# Altium PCB Shared_IoT_Dev.PcbDoc
Units mil, origin at the board's own origin, x right, y up, seen from the top; angles counter-clockwise.
Board outline 2625 x 2375 mil, 2 copper layers (Top Layer, Bottom Layer); 59 components, 68 nets, 257 pads, 156 vias.
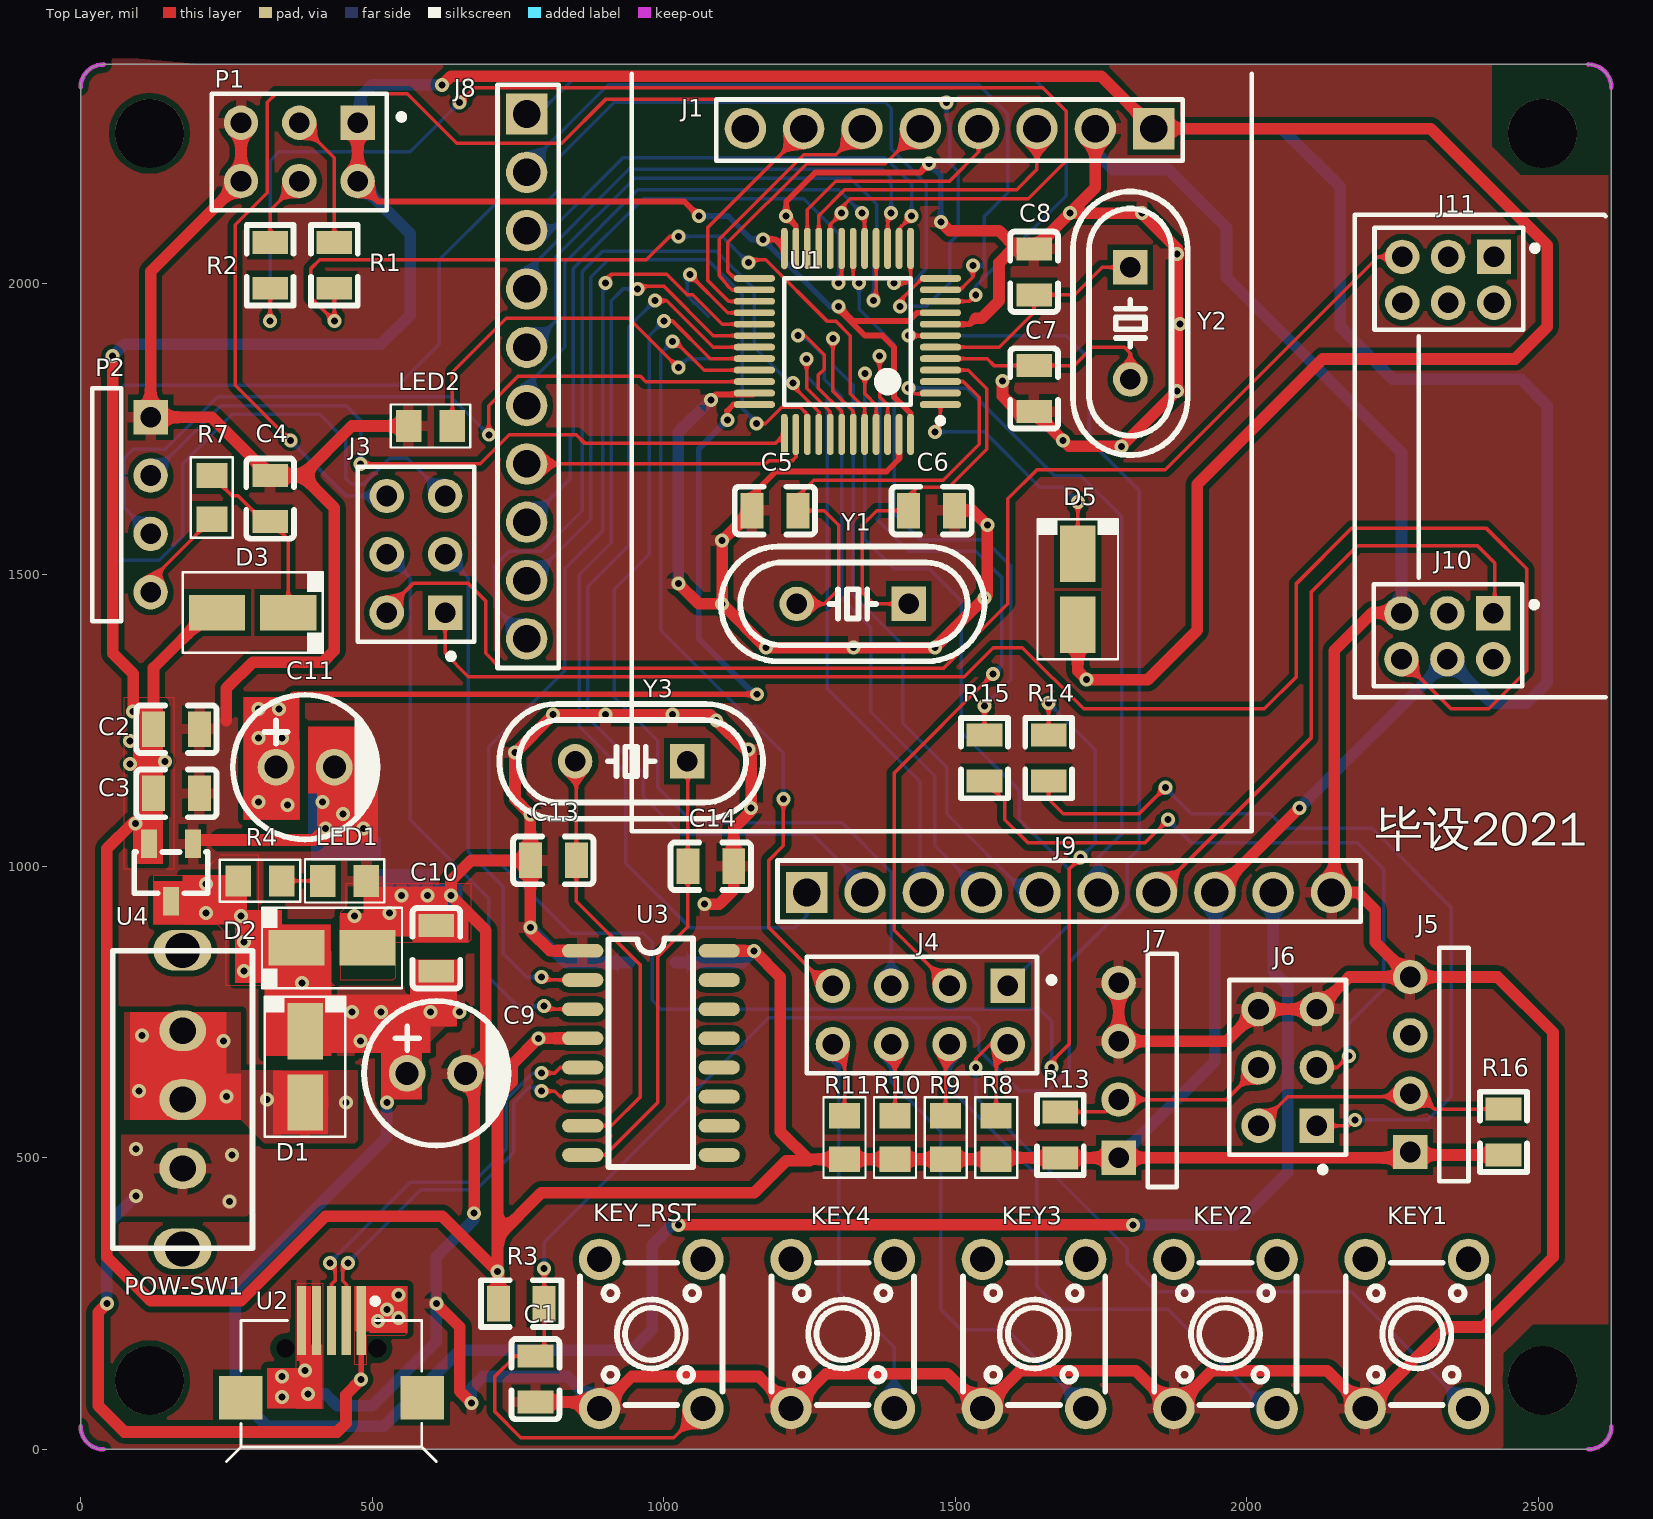
[diagram p0: Top Layer view]
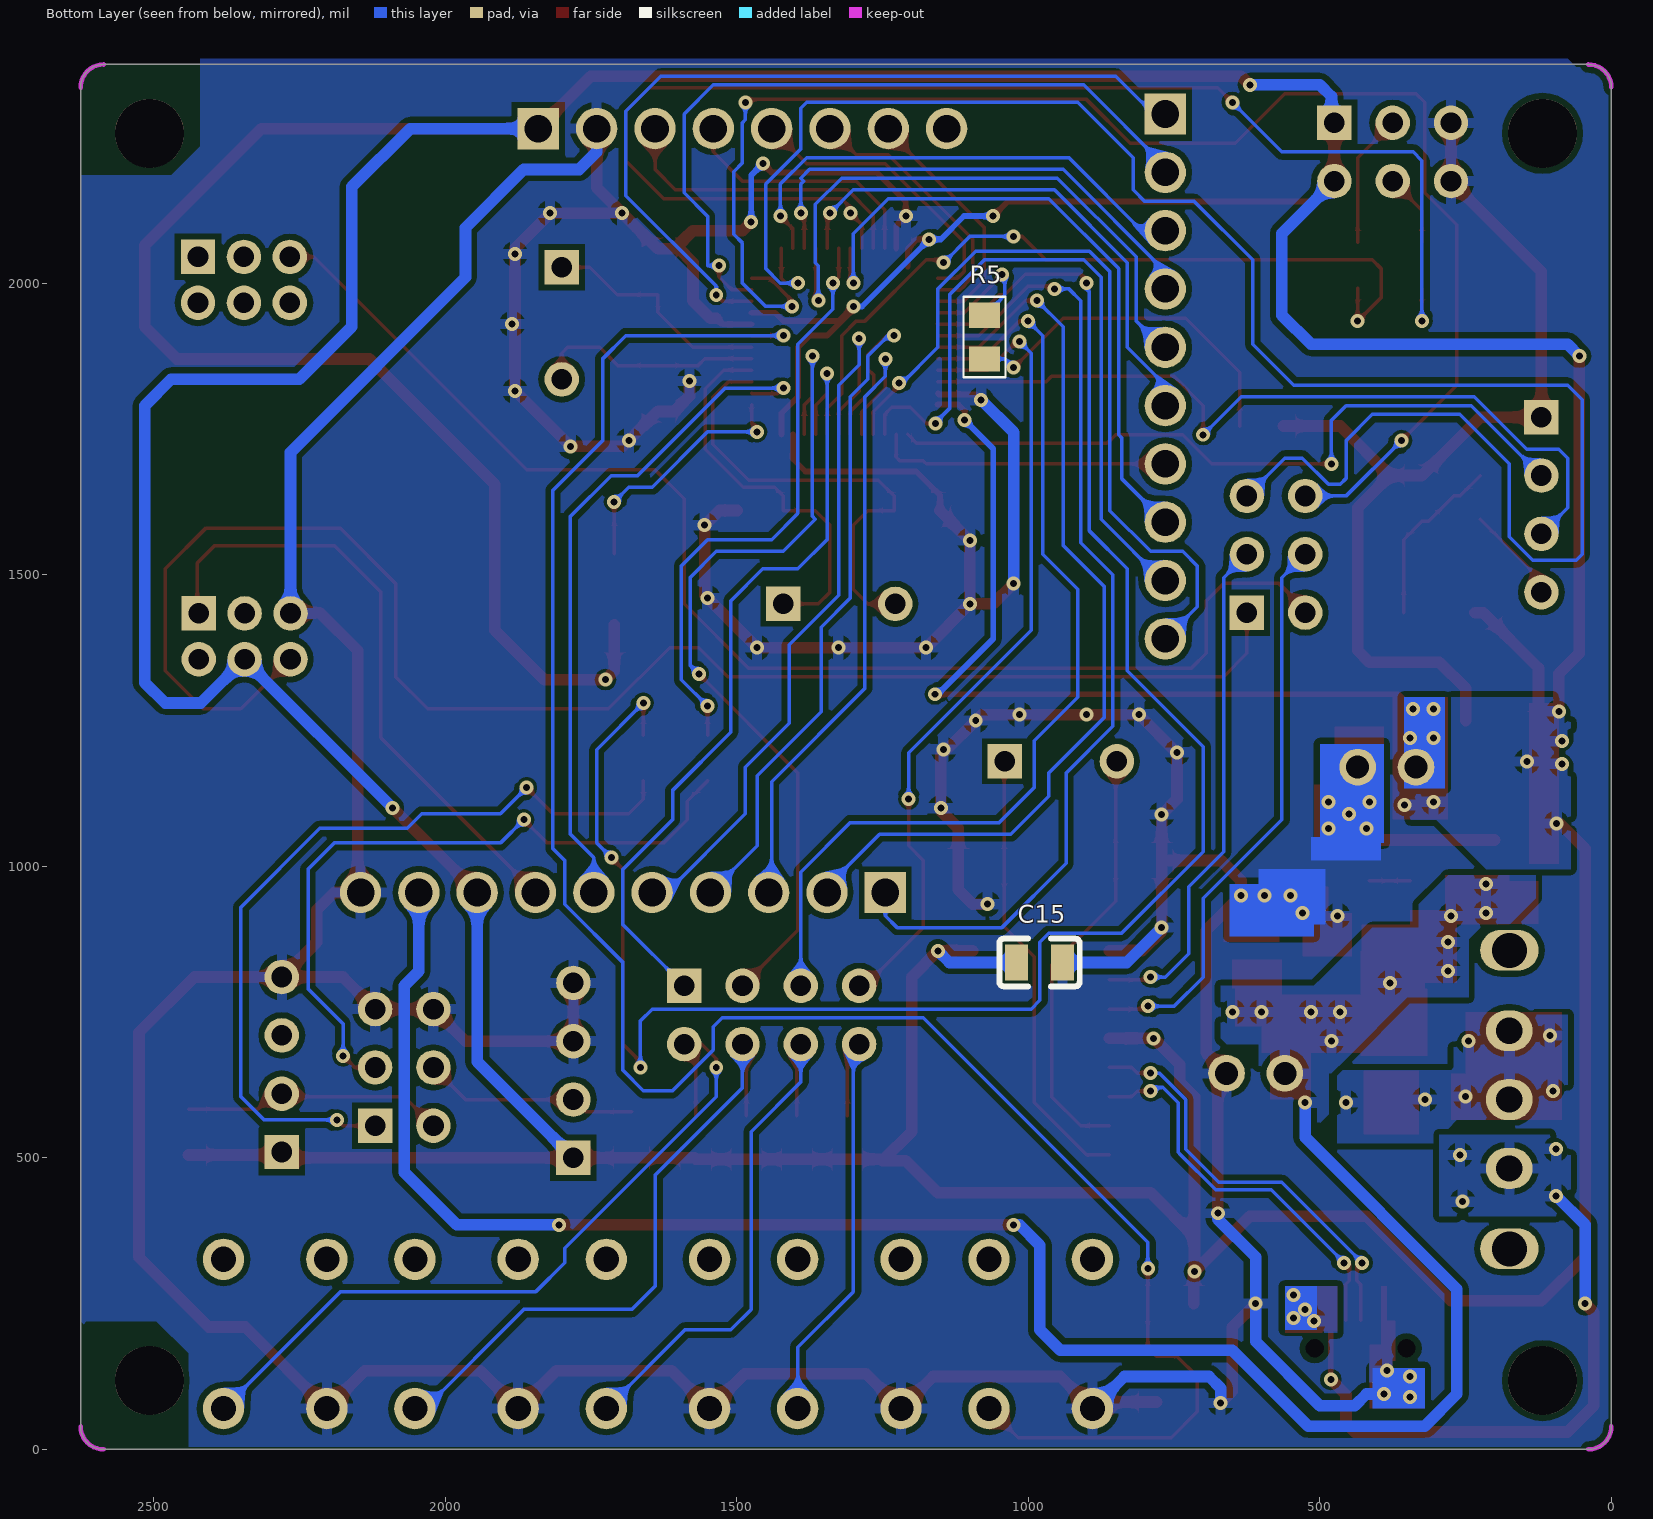
[diagram p1: Bottom Layer view, seen from below]

## Layer stack, top to bottom
Top Solder: solder mask 0.4, Solder Resist, Dk 3.5
Top Layer: signal copper 1.4
Dielectric 1: dielectric 12.6, FR-4, Dk 4.8
Bottom Layer: signal copper 1.4
Bottom Solder: solder mask 0.4, Solder Resist, Dk 3.5

## Board outline
39.37,0 cw(c39.37,39.37) 0,39.99 0,39.37 0,2335.63 cw(c39.37,2335.63) 39.99,2375 39.37,2375 2585.63,2375 cw(c2585.63,2335.63) 2625,2335.01 2625,2335.63 2625,39.37 cw(c2585.63,39.37) 2585.01,0 2585.63,0

## Design rules (kind name [scope] priority, off if disabled: settings)
Clearance via_poly [IsVia vs InPolygon] p1: gap=6
Clearance poly [InPolygon] p2: gap=10
Clearance all [All] p3: gap=6
DiffPairsRouting [InDifferentialPairClass('90OM')] p1: maxlimit=7 minlimit=7 mostfreqgap=7 toplayer_minwidth=6 toplayer_maxwidth=6 toplayer_prefwidth=6 bottomlayer_minwidth=6 bottomlayer_maxwidth=6 bottomlayer_prefwidth=6 maxuncoupledlength=500
HoleToHoleClearance [All] p1: gap=0 allowstackedmicrovias=TRUE
MinimumSolderMaskSliver [All] p1: minsoldermaskwidth=0
PolygonConnect [All] p1: connectstyle=Relief reliefconductorwidth=18 reliefentries=4 polygonreliefangle="90 Angle" airgapwidth=10
RoutingVias [All] p1: holewidth=12 width=24 viastyle="Through Hole" minholewidth=12 minwidth=24 maxholewidth=12 maxwidth=24
SilkToSilkClearance [All] p1: silktosilkclearance=2
SilkToSolderMaskClearance [IsPad] p1: minsilkscreentomaskgap=2 clearancetoexposedcopper=TRUE
SolderMaskExpansion [All] p1: expansion=2.5
Width gnd [InNetClass('GND')] p1: maxlimit=30 minlimit=10 preferedwidth=20
Width pwr [InNetClass('PWR')] p2: maxlimit=30 minlimit=10 preferedwidth=20
Width wall [All] p3: maxlimit=6 minlimit=6 preferedwidth=6
25 further rules are at their usual default settings.

## Classes and differential pairs
net class GND: GND
net class PWR: VBUS VCC3V3 VCC5V
differential pair class 90OM: USB1
differential pair USB1: +D+ -D-

## Components (designator, comment, footprint, x,y, rotation, side; value= is the part's Value field where it differs from the comment)
C1 "CAP" C0805 780,160 r270 top
C2 "CAP" C0805 125,1235 r0 top
C3 "CAP" C0805 125,1125 r0 top
C4 "CAP" C0805 325,1591.26 r90 top
C5 "CAP" C0805 1151.26,1610 r0 top
C6 "CAP" C0805 1498.74,1610 r180 top
C7 "CAP" C0805 1635,1858.74 r270 top
C8 "CAP" C0805 1635,1980 r90 top
C9 "CAP_POL" CAP-TH_POL 560,645 r0 top
C10 "CAP" C0805 610,898.74 r270 top
C11 "CAP_POL" CAP-TH_POL 335,1170 r0 top
C13 "22pF" C0805 850,1010 r180 top
C14 "22pF" C0805 1041.26,1000 r0 top
C15 "0.1uF" C0805 1020,835 r180 bottom
D1 "1N4007" SMA 385,656.02 r270 top
D2 "1N4007" SMA 431.02,860 r0 top
D3 "1N4007" SMA 295,1435 r180 top
D5 "Diode 1N4148" SMA 1710,1475 r270 top
J1 "Header_8" HDR-TH_8P-P2.54-V 1840,2265 r180 top
J3 "Header 3X2" HDR2X3 625,1435 r90 top
J4 "Header4x2" HDR2X4 1590,795 r180 top
J5 "DHT11" HDR1X4H 2280,510 r90 top
J6 "Header 3X2" HDR2X3 2120,555 r90 top
J7 "DS18B20" HDR1X4H 1780,500 r90 top
J8 "Header_10" HDR-TH_10P-P2.54-V 765,2290 r270 top
J9 "Header_10" HDR-TH_10P-P2.54-V 1245,955 r0 top
J10 "Header3X2_Small" HDR3X2_Small 2422.48,1433.74 r180 top
J11 "Header3X2_Small" HDR3X2_Small 2423.74,2045 r180 top
KEY1 "KEY" KEY-TH_4P 2202.8,70 r90 top
KEY2 "KEY" KEY-TH_4P 1874.6,70 r90 top
KEY3 "KEY" KEY-TH_4P 1546.4,70 r90 top
KEY4 "KEY" KEY-TH_4P 1218.2,70 r90 top
KEY_RST "KEY" KEY-TH_4P 890,70 r90 top
LED1 "LED2_1" 0805C 452.6,975 r0 top
LED2 "LED2_1" 0805C 600,1755 r180 top
P1 "Header 3X2" HDR2X3 475,2275 r180 top
P2 "SWD" HDR1X4H 120,1770 r270 top
POW-SW1 "Switch" SW 175,600 r90 top
R1 "100K,0603" R0805 435,1991.26 r90 top
R2 "100K,0603" R0805 325,2070 r270 top
R3 "10K,0603" R0805 795,250 r180 top
R4 "Res2" 0805R 307.6,975 r0 top
R5 "Res2" 0805R 1075,1907.4 r270 bottom
R7 "Res2" 0805R 225,1632.6 r90 top
R8 "Res2" 0805R 1570,535 r270 top
R9 "Res2" 0805R 1483.33,535 r270 top
R10 "Res2" 0805R 1396.67,535 r270 top
R11 "Res2" 0805R 1310,535 r270 top
R13 "4.7K" R0805 1680,578.74 r270 top
R14 "100" R0805 1660,1146.26 r90 top
R15 "100" R0805 1550,1146.26 r90 top
R16 "4.7K" R0805 2440,583.74 r270 top
U1 "STM32F103C8T6" 48P 1315,1900 r180 top
U2 "USB-mrico" MICRO_USB 430,155 r0 top
U3 "CH340G" CH340G_SOIC 861,855 r180 top
U4 "XC6206P332MR" XC_SOT-23-3 192.4,1038.4 r90 top
Y1 "32.768K" CRYSTAL 1420,1450 r180 top
Y2 "8M" CRYSTAL 1800,2027 r270 top
Y3 "CRYSTAL_12M" CRYSTAL 1040,1180 r180 top

## Footprints (in the part's own frame and the unit in brackets; to place one, negate y for a bottom-side part, rotate by r counter-clockwise, add the part's x,y. Pads: shape width x height; smd on the part's side, far side on the other; paste and mask are expansions set on the pad)
48P [mm]
  oval 1.8x0.3 smd: 1(-4.05,2.75) 2(-4.05,2.25) 3(-4.05,1.75) 4(-4.05,1.25) 5(-4.05,0.75) 6(-4.05,0.25) 7(-4.05,-0.25) 8(-4.05,-0.75) 9(-4.05,-1.25) 10(-4.05,-1.75) 11(-4.05,-2.25) 12(-4.05,-2.75) 25(4.05,-2.75) 26(4.05,-2.25) 27(4.05,-1.75) 28(4.05,-1.25) 29(4.05,-0.75) 30(4.05,-0.25) 31(4.05,0.25) 32(4.05,0.75) 33(4.05,1.25) 34(4.05,1.75) 35(4.05,2.25) 36(4.05,2.75)
  oval 0.3x1.8 smd: 13(-2.75,-4.05) 14(-2.25,-4.05) 15(-1.75,-4.05) 16(-1.25,-4.05) 17(-0.75,-4.05) 18(-0.25,-4.05) 19(0.25,-4.05) 20(0.75,-4.05) 21(1.25,-4.05) 22(1.75,-4.05) 23(2.25,-4.05) 24(2.75,-4.05) 37(2.75,4.05) 38(2.25,4.05) 39(1.75,4.05) 40(1.25,4.05) 41(0.75,4.05) 42(0.25,4.05) 43(-0.25,4.05) 44(-0.75,4.05) 45(-1.25,4.05) 46(-1.75,4.05) 47(-2.25,4.05) 48(-2.75,4.05)
  silkscreen extent -4.18,-2.75 2.75,3.57, body extent -3.5,-3.5 3.5,3.5, height 1.6
0805C [mm] "Chip Capacitor, 2-Leads, Body 2.0x1.3mm, IPC Medium Density"
  rect 1.1x1.4 smd: 1(-0.95,0) 2(0.95,0)
  silkscreen extent -1.73,-0.94 1.73,0.94, body extent -1.05,-0.67 1.05,0.67, height 1.2
0805R [mm] "Chip Resistor, 2-Leads, Body 2.0x1.3mm, IPC Medium Density"
  rect 1.1x1.35 smd: 1(-0.95,0) 2(0.95,0)
  silkscreen extent -1.75,-0.91 1.75,0.91, body extent -1.05,-0.67 1.05,0.67, height 1.2
C0805 [mm]
  rect 1x1.55 smd: 1(0,0) 2(2,0)
  silkscreen extent -0.75,-1.04 2.75,1.04
CAP-TH_POL [mm]
  round 1.6 hole 1: 1(0,0) 2(2.54,0)
  silkscreen extent -1.88,-3.15 4.44,3.15
CH340G_SOIC [mm]
  oval 1.798x0.6 smd: 1(0,0) 2(0,1.27) 3(0,2.54) 4(0,3.81) 5(0,5.08) 6(0,6.35) 7(0,7.62) 8(0,8.89) 9(-5.944,8.89) 10(-5.944,7.62) 11(-5.944,6.35) 12(-5.944,5.08) 13(-5.944,3.81) 14(-5.944,2.54) 15(-5.944,1.27) 16(-5.944,0)
  silkscreen extent -4.8,-0.53 -1.12,9.42
CRYSTAL [mm]
  rect 1.5x1.5 hole 0.9: 1(0,0)
  round 1.5 hole 0.9: 2(4.877,0)
  silkscreen extent -3.3,-2.5 8.18,2.5
HDR1X4H [mm] "Connector; Header; 4 Position; Right Angle"
  rect 1.5x1.5 hole 0.9: 1(0,0)
  round 1.5 hole 0.9: 2(2.54,0) 3(5.08,0) 4(7.62,0)
  silkscreen extent -1.27,-2.54 8.89,-1.27
HDR2X3 [mm] "Connector; Header; 3x2 Position"
  rect 1.5x1.5 hole 0.9: 1(0,0)
  round 1.5 hole 0.9: 2(0,2.54) 3(2.54,0) 4(2.54,2.54) 5(5.08,0) 6(5.08,2.54)
  silkscreen extent -2.03,-1.27 6.35,3.81
HDR2X4 [mm]
  rect 1.5x1.5 hole 0.9: 1(0,0)
  round 1.5 hole 0.9: 2(0,2.54) 3(2.54,0) 4(2.54,2.54) 5(5.08,0) 6(5.08,2.54) 7(7.62,0) 8(7.62,2.54)
  silkscreen extent -2.03,-1.27 8.76,3.81
HDR3X2_Small [mm]
  rect 1.5x1.5 hole 0.9: 1(0,0)
  round 1.5 hole 0.9: 2(0,2) 3(2,0) 4(2,2) 5(4,0) 6(4,2)
  silkscreen extent -1.91,-1.27 5.21,3.18
HDR-TH_8P-P2.54-V [mm]
  rect 1.8x1.8 hole 1.2: 1(0,0)
  round 1.8 hole 1.2: 2(2.54,0) 3(5.08,0) 4(7.62,0) 5(10.16,0) 6(12.7,0) 7(15.24,0) 8(17.78,0)
  silkscreen extent -1.27,-1.27 19.05,1.4
HDR-TH_10P-P2.54-V [mm]
  rect 1.8x1.8 hole 1.2: 1(0,0)
  round 1.8 hole 1.2: 2(2.54,0) 3(5.08,0) 4(7.62,0) 5(10.16,0) 6(12.7,0) 7(15.24,0) 8(17.78,0) 9(20.32,0) 10(22.86,0)
  silkscreen extent -1.27,-1.27 24.13,1.4
KEY-TH_4P [mm]
  round 1.8 hole 1.1: 1(0,0) 2(6.502,0) 3(0,-4.501) 4(6.502,-4.501)
  silkscreen extent 0.15,-5.35 6.35,0.85
MICRO_USB [mm]
  rect 0.4x3 smd: 1(1.3,1.679) 2(0.65,1.679) 3(0,1.679) 4(-0.65,1.679) 5(-1.3,1.679)
  round 0 hole 0.8 unplated: MH1(2,0.471) MH2(-2,0.471)
  rect 1.9x1.9 smd: ""(-3.95,-1.679) ""(3.95,-1.679)
  silkscreen extent -4.57,-4.46 4.57,2.64
R0805 [mm]
  rect 1x1.55 smd: 1(0,0) 2(2,0)
  silkscreen extent -0.75,-1.02 2.75,1.02
SMA [mm] "Molded Diode, 2-Leads, Body 4.3x2.7mm, IPC Medium Density"
  rect 2.45x1.55 smd: 1(1.55,0) 2(-1.55,0)
  silkscreen extent -3.05,-1.75 3.05,1.75, body extent -2.3,-1.45 2.3,1.45, height 2.44
SW [mil]
  oval 70x80 hole 45: 1(-118.11,0) 2(0,0) 3(118.11,0)
  oval 70x100 hole 60: 4(-255.91,0) 5(255.91,0)
  silkscreen extent -255,-120 255,120
XC_SOT-23-3 [mm]
  rect 1.25x0.7 smd: 1(0,0) 2(0,1.9) 3(-2.499,0.95)
  silkscreen extent -2.15,-0.65 -0.35,2.55

## Part data
C13 C14 C15: library part CAP, "CAP"
D1 D2 D3: library part DIODE
D5: "High Conductance Fast Diode"
J3 J6 P1: "Header, 3-Pin, Dual row"
J5 J7 P2: library part "Header 4", "Header, 4-Pin"
LED1 LED2: "Typical RED, GREEN, YELLOW, AMBER GaAs LED"
POW-SW1: library part Swich_On_Off
R1 R2 R3: library part Res2, "Resistor"
R4 R5 R8 R9 R10 R11: library part Res_3, "Resistor"
R7: "Resistor"
R13 R14 R15 R16: library part RES, "RES"
U2: library part usb-STM
U4: "XC6206P332MR Power Lower to 3.3v"
Y1 Y2 Y3: library part CRYSTAL, "CRYSTAL"

## Free pads (board coordinates)
  round 118.11 hole 118.11 unplated paste+12: 0(118.11,118.11) 0(118.11,2256.89) 0(2506.89,118.11) 0(2506.89,2256.89)

## Via types
v1: diameter 24, hole 12, Top Layer to Bottom Layer, 156 vias

## Nets (pads, with @x,y where several pads share a name; then routed paths per layer and width w, separated by ;. In a path a pad name is that pad's centre, name@x,y a point inside that pad or via, vN(x,y) a via of type N, cw(c..) or ccw(c..) an arc to the next point about the centre after c; other vN are vias at no path point)
BOOT0: R1.1 U1.44 | length 1364.8
  Top Layer w6: R1.1 v1(435,1935) 395,1975 395,2025 410,2040 970,2040 1010,2080 v1(1025,2080) ; v1(1145,2035) 1150,2035 1155,2040 1175,2040 1280,1935 1295,1935 1320,1910 1320,1810 1344.53,1785.47 U1.44
  Bottom Layer w6: v1(1025,2080) 1100,2080 v1(1145,2035)
BOOT1: R2.2 U1.20 | length 2346.4
  Top Layer w6: v1(325,1935) R2.2 ; v1(650,2310) 675,2335 1650,2335 1690,2295 1690,2210 1625,2145 1320,2145 1305,2130 v1(1305,2120) 1285.47,2100.47 U1.20
  Bottom Layer w6: v1(325,1935) 325,2210 340,2225 565,2225 v1(650,2310)
D+: U2.3 U3.5 | length 729.8
  Top Layer w6: v1(427.3,320) 431.3,320 436.3,315 436.3,289.45 430,283.16 U2.3 ; v1(790,645.5) 813.11,645.5 822.61,655 U3.5
  Bottom Layer w6: v1(427.3,320) 565.3,458 673,458 730,515 730,600 775.5,645.5 v1(790,645.5)
D-: U2.2 U3.6 | length 691.2
  Top Layer w6: U2.2 455.59,283.16 449.3,289.45 449.3,315 454.3,320 v1(458.3,320) ; v1(790,614.5) 813.11,614.5 822.61,605 U3.6
  Bottom Layer w6: v1(458.3,320) 583.3,445 678.38,445 739.19,505.81 743,509.62 743,594.62 769.19,620.81 783.69,620.81 v1(790,614.5)
DHT11_DQ: J5.2 J6.2 R16.1 | length 453.7
  Top Layer w6: J6.2 2070,605 2275,605 J5.2 2295,610 2321.26,583.74 R16.1
DS_DQ: J6.4 J7.2 R13.1 | length 371.6
  Top Layer w6: R13.1 1758.74,578.74 J7.2 1965,600 J6.4
ESP_RST: J9.7 J10.1 | length 1075.3
  Top Layer w6: J9.7 2110,1220 2110,1470 2190,1550 2395,1550 2425,1520 J10.1@2425,1430
ESP_RX: J3.1 J10.6 | length 2709
  Top Layer w6: J3.1 625,1365 665,1325 1515,1325 1565,1375 1615,1375 1720,1270 2030,1270 2085,1325 2085,1485 2180,1580 2410,1580 2480,1510 2480,1335 2415,1270 2350,1270 J10.6
ESP_TX: J3.2 J11.5 | length 2273.9
  Top Layer w6: J3.2 525,1440 570,1485 665,1485 695,1455 695,1365 720,1340 1480,1340 1590,1450 1590,1630 1640,1680 1860,1680 2225,2045 J11.5@2265,2045
GND: C1.2 C2.2 C3.2 C4.2 C5.1 C6.1 C7.2 C8.2 C9.2 C10.1 C11.2 C13.2 C14.2 C15.2 D2.1 J1.2 J5.4 J6.5 J6.6 J7.3 J7.4 J9.10 J10.5 KEY1.1 KEY2.1 KEY3.1 KEY4.1 KEY_RST.1 LED1.2 LED2.2 P1.5 P1.6 P2.1 U1.8 U1.23 U1.35 U1.47 U2.4 U2.5 U3.1 U4.1 | length 14044.5
  Top Layer w10: v1@1077.5,1797.5 1089,1809 1153,1809 U1.35@1155,1811 ; C5.1 1151.26,1636.26 1192,1677 1382,1677 1403.58,1698.58 U1.47 ; U1.23 1226.42,2098.58 v1(1210,2115) 1210,2140 1260,2190 1440,2190 v1(1455,2205) ; U1.8 1524.53,1929.53 1535,1940
  Top Layer w20: U4.1@200,1045 400,1045 v1(420,1065) ; 250,1250 250,1305 295,1350 415,1350 435,1370 435,1615 380,1670 ; P1.5 P1.6 120,2020 P2.1 225,1770 C4.2 380,1670 ; LED2.2 465,1755 380,1670 ; v1(610,250) 650,210 650,100 v1(670,80) ; v1(675,405) 675,630 C9.2 695,680 695,890 v1(635,950) 635,975 670,1010 C13.2 ; C1.2 878.74,81.26 KEY_RST.1 945,125 1163.2,125 KEY4.1 1278.2,130 1486.4,130 KEY3.1 1611.4,135 1809.6,135 KEY2.1 1939.6,135 2137.8,135 KEY1.1 2342.8,210 2405,210 2525,330 2525,715 2430,810 J5.4@2285,810 ; U3.1 805,855 771.26,888.74 v1(771.26,895) C13.2 ; v1(1025,1485) 1060,1450 v1(1100,1450) ; v1(1070,935) 1095,935 1120,960 C14.2 1120,1065 1150,1095 1150,1190 1080,1260 v1(810,1260) v1(745,1195) 745,1115 v1(771.26,1088.74) C13.2 ; C5.1 v1(1100,1558.74) v1(1100,1450) ; v1(1475,2105) 1490,2090 1575,2090 C8.2@1606.26,2058.74 ; C6.1 1530,1610 v1(1555,1585) 1555,1465 v1(1465,1375) v1(1175,1375) v1(1100,1450) ; 1535,1940 1545,1940 1575,1970 1575,2035 1598.74,2058.74 C8.2@1606.26,2058.74 ; 1581,1814 v1(1581,1832) 1581,1806 1607,1780 C7.2 1695,1720 v1(1785,1720) v1(1880,1815) 1880,2060 v1(1820,2120) v1(1696.26,2120) ; J1.2 1740,2163.74 v1(1696.26,2120) ; J7.4 J7.3 1965,700 J6.6 J6.5 2175,810 J5.4 2220,870 2220,925 2190,955 J9.10 2150,960 2150,1370 2215,1435 J10.5@2265,1435 ; C8.2@1606.26,2058.74 C8.2 v1(1696.26,2120)
  Bottom Layer w10: v1(1455,2205) 1475,2185 v1(1475,2105)
  Bottom Layer w20: v1(390,95) 420,95 440,75 500,75 610,185 v1(610,250) 610,330 675,395 v1(675,405) ; v1(670,80) 670,105 690,125 835,125 KEY_RST.1 ; v1(771.26,895) 831.26,835 C15.2 ; v1(1025,1485) 1025,1744 v1(1081,1800) ; J1.2 1740,2225 1770,2195 1865,2195 1965,2095 1965,2010 2265,1710 J10.5
  other v1: 345,90 345,125 385,135 470,915 530,920 550,950 595,950 485,1065 450,1090 1150,1100 415,1110 485,1110 1145,1200 1090,1250 900,1260 1015,1260 1325,1375 1550,1460 1685,1730 1885,1930 1880,2050
KEY1: J4.2 KEY1.3 R8.1 | length 1349.6
  Top Layer w6: v1@1530,660 v1(1535,655) 1535,670 1560,695 J4.2 1570,675 R8.1
  Bottom Layer w6: v1(1535,655) 1535,605 1795,345 1795,320 1845,270 2180,270 KEY1.3
KEY2: J4.4 KEY2.3 R9.1 | length 1134.5
  Top Layer w6: J4.4@1475,695 J4.4 1483.33,688.33 R9.1 ; KEY2.3 KEY2.3@2070,70
  Bottom Layer w6: J4.4 1490,620 1640,470 1640,280 1680,240 1865,240 2035,70 KEY2.3
KEY3: J4.6 KEY3.3 R10.1 | length 966
  Top Layer w6: J4.6@1380,695 J4.6 1396.67,688.33 R10.1 ; KEY3.3 KEY3.3@1745,70
  Bottom Layer w6: J4.6 1390,630 1475,545 1475,240 1510,205 1588.6,205 KEY3.3
KEY4: J4.8 KEY4.3 R11.1 | length 829
  Top Layer w6: J4.8 1310,675 R11.1 ; KEY4.3 KEY4.3@1425,70
  Bottom Layer w6: J4.8 1300,685 1300,270 1395,175 KEY4.3@1395,70
LED2: R5.1 U1.28 | length 236
  Top Layer w6: v1(1045,2015) 1045,2014 1109.79,1949.21 U1.28
  Bottom Layer w6: v1(1045,2015) 1044,2015 1040,2019 1040,1979 R5.1@1076,1943
NetC4_1: C4.1 D3.2 R7.2 | length 301.7
  Top Layer w6: R7.2 260,1635 270,1635 313.74,1591.26 C4.1 356.02,1560.24 D3.2
NetC13_1: C13.1 U3.7 Y3.2 | length 741.1
  Top Layer w6: Y3.2 850,1178 C13.1 850,940 960,830 960,605 910,555 U3.7
NetC14_1: C14.1 U3.8 Y3.1 | length 773
  Top Layer w6: U3.8 900,505 990,595 990,845 1041.26,896.26 C14.1 1041.26,1178.74 Y3.1
NetD1_1: D1.1 POW-SW1.2 POW-SW1.3
  other v1: 455,595 320,600 250,605 100,615 245,700 105,710
NetD5_2: D5.2 U1.1 | length 434.3
  Top Layer w6: v1(1465,1745) 1465,1751.1 1474.45,1760.55 U1.1 ; D5.2 v1(1710,1625)
  Bottom Layer w6: v1(1465,1745) 1550,1745 1645,1650 1685,1650 v1(1710,1625)
NetJ6_1: J6.1 R14.1 | length 1410.9
  Top Layer w6: R14.1 1660,1115 1685,1090 1815,1090 v1(1860,1135) ; J6.1 2175,555 v1(2185,565)
  Bottom Layer w6: v1(1860,1135) 1905,1090 2040,1090 2065,1065 2215,1065 2350,930 2350,605 2310,565 v1(2185,565)
NetJ6_3: J6.3 R15.1 | length 1207.2
  Top Layer w6: R15.1 1585,1111.26 1585,1080 1625,1040 1825,1040 v1(1865,1080) ; J6.3 2155,655 v1(2175,675)
  Bottom Layer w6: v1(1865,1080) 1905,1040 2190,1040 2235,995 2235,790 2175,730 v1(2175,675)
NetLED1_1: LED1.1 R4.2 | length 70.2
  Top Layer w6: R4.2 LED1.1
NetLED2_1: LED2.1 R5.2 | length 609.8
  Top Layer w6: LED2.1 637.4,1847.4 730,1940 940,1940 v1(1025,1855)
  Bottom Layer w6: v1(1025,1855) 1040,1870 R5.2
NetP1_3: P1.3 R1.2 | length 229.9
  Top Layer w6: P1.3 435,2215 R1.2
NetP1_4: P1.4 R2.1 | length 125.7
  Top Layer w6: R2.1 325,2125 P1.4
NetP2_4: P2.4 R7.1 | length 168.7
  Top Layer w6: P2.4 120,1490.2 R7.1
OLED_CS: J1.3 U1.21 | length 533.4
  Top Layer w6: U1.21 1265.79,2115.79 1310,2160 1605,2160 1640,2195 J1.3
OLED_D0: J1.6 U1.26 | length 457.2
  Top Layer w6: U1.26 1116.42,1988.58 1110,1995 1095,2013.75 1095,2075 1240,2220 1295,2220 J1.6
OLED_D1: J1.7 U1.27 | length 423.9
  Top Layer w6: U1.27 1111.1,1968.9 1075,2005 1075,2095 1240,2260 J1.7
OLED_DC: J1.5 U1.25 | length 511.2
  Top Layer w6: U1.25 1121.73,2008.27 1110,2020 1110,2070 1245,2205 1380,2205 J1.5
OLED_RES: J1.4 U1.22 | length 441.5
  Top Layer w6: U1.22 1246.1,2126.1 1295,2175 1490,2175 1540,2225 J1.4
OSCIN: C7.1 U1.5 Y2.2 | length 392.5
  Top Layer w6: U1.5 1554.53,1870.47 1566.26,1858.74 C7.1 1703.74,1858.74 1735,1890 1790,1890 1800,1880 Y2.2
OSCOUT: C8.1 U1.6 Y2.1 | length 399.8
  Top Layer w6: U1.6 1575.16,1890.16 1635,1950 C8.1 1705,1980 1752,2027 Y2.1
PA0: J8.1 U1.10 | length 1422.3
  Top Layer w6: U1.10 1523.9,1968.9 v1(1535,1980)
  Bottom Layer w6: J8.1@770,2275 850,2355 1630,2355 1690,2295 1690,2150 1535,1995 v1(1535,1980)
PA1: J8.2 U1.11 | length 1294.7
  Top Layer w6: U1.11 1508.58,1988.58 1530,2010 v1(1530,2030)
  Bottom Layer w6: J8.2 765,2200 905,2340 1540,2340 1590,2290 1590,2155 1550,2115 1550,2030 v1(1530,2030)
PA4: J8.3 U1.14 | length 861.9
  Top Layer w6: U1.14 1403.58,2093.58 1420,2110 1420,2120 v1(1425,2115)
  Bottom Layer w6: J8.3@765,2085 800,2085 930,2215 1380,2215 1425,2170 v1(1425,2115)
PA5: J8.4 U1.15 | length 876.8
  Top Layer w6: U1.15 1383.9,2118.9 1385,2117.8 1387.2,2120 v1(1390,2120) v1@1395,2125
  Bottom Layer w6: J8.4@765,1985 765,2020 940,2195 1375,2195 1390,2180 1385,2175 1390,2170 v1(1390,2120)
PA6: J8.5 U1.16 | length 1061.5
  Top Layer w6: v1(1360,1970) 1364.21,1974.21 U1.16
  Bottom Layer w6: J8.5 770,1890 815,1935 815,2045 950,2180 1320,2180 1365,2135 1365,2035 1360,2030 v1(1360,1970)
PA7: J8.6 U1.17 | length 912.7
  Top Layer w6: v1(1340,2120) 1344.53,2115.47 U1.17
  Bottom Layer w6: J8.6 765,1825 830,1890 830,2035 955,2160 1300,2160 v1(1340,2120)
PA8: R14.2 U1.29 | length 3326.5
  Top Layer w6: v1(900,2000) 900,2005 910,2015 1005,2015 1040,1980 1050,1980 1100.47,1929.53 U1.29 U1.29@1156.02,1930 ; R14.2 v1(1660,1280) ; v1(1665,655) 1665,665 1695,695 1695,995 v1(1715,1015)
  Bottom Layer w6: v1(900,2000) 900,1990 895,1985 895,1575 830,1510 830,1335 700,1205 700,1025 840,885 965,885 980,870 980,770 995,755 1645,755 1665,735 v1(1665,655) ; v1(1660,1280) 1740,1200 1740,1040 v1(1715,1015)
PA9: J9.1 U1.30 | length 1715.9
  Top Layer w6: v1(955,1990) 960,1995 1000,1995 1085.16,1909.84 U1.30
  Bottom Layer w6: v1(955,1990) 930,1990 910,1970 910,1555 855,1500 855,1240 935,1160 935,1005 1045,895 1225,895 1245,915 J9.1
PA10: J9.2 U1.31 | length 1594.8
  Top Layer w6: v1(985,1970) 1005,1970 1084.84,1890.16 U1.31
  Bottom Layer w6: v1(985,1970) 940,1925 940,1550 870,1480 870,1255 965,1160 965,1120 1030,1055 1255,1055 1345,965 J9.2
PA11: J4.5 U1.32 | length 1723.6
  Top Layer w6: v1(1000,1935) 1015,1935 1079.53,1870.47 U1.32 ; J4.5 J4.5@1390,815
  Bottom Layer w6: v1(1000,1935) 975,1910 975,1535 915,1475 915,1290 990,1215 990,1135 1050,1075 1305,1075 1390,990 J4.5
PA12: J4.7 U1.33 | length 1433
  Top Layer w6: v1(1015,1900) 1020,1900 1069.21,1850.79 U1.33 ; v1(1205,1115) 1205,1035 1180,1010 1180,895 1280,795 J4.7 J4.7@1290,805
  Bottom Layer w6: v1(1015,1900) 995,1880 995,1405 1205,1195 v1(1205,1115)
PA15: J8.7 U1.38 | length 505.3
  Top Layer w6: J8.7 1175,1690 1180,1695 1220,1695 1226.42,1701.42 U1.38
PB0: R15.2 U1.18 | length 1029.4
  Top Layer w6: U1.18 1324.84,2010.16 v1(1335,2000) ; R15.2 v1(1550,1275)
  Bottom Layer w6: v1(1335,2000) 1335,1955 1395,1895 1395,1605 1440,1560 1550,1560 1595,1515 1595,1320 v1(1550,1275)
PB1: J8.8 U1.19 | length 1144.3
  Top Layer w6: v1(1300,2000) 1305.16,2005.16 U1.19
  Bottom Layer w6: J8.8 840,1665 840,1735 845,1740 845,2025 965,2145 1240,2145 1300,2085 v1(1300,2000)
PB3: J8.9 U1.39 | length 1236.3
  Top Layer w6: v1(1159,1759) 1174,1759 1202,1787 1234,1787 1246.1,1774.9 U1.39
  Bottom Layer w6: J8.9@765,1485 875,1595 875,2010 905,2040 1075,2040 1135,1980 1135,1785 v1@1160,1760
PB4: J8.10 U1.40 | length 1382.1
  Top Layer w6: v1(1222,1829) 1222,1823 1265.79,1779.21 U1.40
  Bottom Layer w6: J8.10 710,1445 710,1515 735,1540 790,1540 860,1610 860,2020 895,2055 1090,2055 1155,1990 1155,1890 v1@1220,1825
PB5: J9.3 U1.41 | length 1144.1
  Top Layer w6: v1(1245,1870) 1245,1820 1285.47,1779.53 U1.41
  Bottom Layer w6: v1(1245,1870) 1245,1840 1280,1805 1280,1305 1440,1145 1440,960 J9.3
PB6: J9.4 U1.42 | length 1307.5
  Top Layer w6: v1(1230,1910) 1242.5,1910 1275,1877.5 1275,1852.5 1265,1842.5 1265,1820 1305.16,1779.84 U1.42
  Bottom Layer w6: v1(1230,1910) 1240,1910 1275,1875 1275,1835 1305,1805 1305,1460 1355,1410 1355,1265 1465,1155 1465,1035 J9.4
PB7: J9.5 U1.43 | length 1290.6
  Top Layer w6: v1(1290,1905) 1290,1815 1324.84,1780.16 U1.43
  Bottom Layer w6: v1(1290,1905) 1290,1860 1325,1825 1325,1465 1410,1380 1410,1245 1485,1170 1485,1090 1620,955 J9.5
PB8: J4.1 U1.45 | length 1386
  Top Layer w6: v1(1345,1845) 1345,1810 1364.21,1790.79 U1.45
  Bottom Layer w6: v1(1345,1845) 1345,1560 1395,1510 1455,1510 1510,1455 1510,1230 1610,1130 1610,1080 1695,995 1695,900 J4.1
PB9: J4.3 U1.46 | length 1494.7
  Top Layer w6: v1(1370,1875) 1370,1805 1383.9,1791.1 U1.46 ; J4.3 1395,890 1395,1160 v1(1565,1330)
  Bottom Layer w6: v1(1370,1875) 1370,1600 1365,1595 1420,1540 1535,1540 1580,1495 1580,1345 v1(1565,1330)
PC13: J9.6 U1.2 | length 1176.9
  Top Layer w6: v1(1420,1820) 1430,1810 1473.03,1810 U1.2
  Bottom Layer w6: v1(1420,1820) 1520,1820 1670,1670 1715,1670 1785,1600 1785,1055 1745,1015 J9.6
PC14: C5.2 U1.3 Y1.2 | length 803.4
  Top Layer w6: Y1.2 1275,1450 1300,1475 1300,1585 1275,1610 C5.2 1230,1635 1257,1662 1479,1662 1541,1724 1541,1804 1513.9,1831.1 U1.3
PC15: C6.2 U1.4 Y1.1 | length 682.4
  Top Layer w6: Y1.1 1360,1450 1340,1470 1340,1585 1365,1610 C6.2 1420,1635 1435,1650 1489,1650 1554,1715 1554,1818.84 1522.05,1850.79 U1.4
RESET: C1.1 KEY_RST.3 R3.1 U1.7 | length 3577.4
  Top Layer w6: v1(795,310) R3.1 795,175 C1.1 745,160 710,125 710,65 755,20 1017.2,20 KEY_RST.3 ; v1@1420,1909.84 U1.7
  Bottom Layer w6: v1(795,310) 795,355 1180,740 1525,740 1540,725 1540,685 1610,615 1660,615 1695,650 1695,835 1795,935 1795,1010 1815,1030 1815,1645 1730,1730 1730,1870 1690,1910 v1(1420,1910)
SWCLK: P2.2 U1.37 | length 1255.2
  Top Layer w6: v1(480,1690) 685,1690 735,1740 850,1740 865,1725 1191.18,1725 U1.37
  Bottom Layer w6: P2.2 240,1790 455,1790 480,1765 v1(480,1690)
SWIO: P2.3 U1.34 | length 1374
  Top Layer w6: v1(700,1740) 700,1790 750,1840 960,1840 968.9,1831.1 U1.34
  Bottom Layer w6: P2.3 75,1615 75,1700 90,1715 145,1715 235,1805 635,1805 v1(700,1740)
URX: J3.4 U3.3 | length 986.3
  Top Layer w6: v1@790,760 v1(795,760) 800,755 U3.3
  Bottom Layer w6: J3.4 565,1495 565,1080 700,945 700,810 750,760 v1(795,760)
USART2_RX: J3.5 U1.13 | length 3274.9
  Top Layer w6: v1(1395,2000) 1415,2000 1423.27,2008.27 U1.13
  Bottom Layer w6: J3.5 560,1700 530,1700 485,1655 465,1655 455,1665 455,1730 410,1775 260,1775 175,1690 175,1565 135,1525 60,1525 50,1535 50,1800 75,1825 545,1825 615,1895 615,2040 715,2140 800,2140 820,2160 820,2215 915,2310 1380,2310 1390,2300 1390,2230 1450,2170 1450,2025 1425,2000 v1(1395,2000)
USART2_TX: J3.6 U1.12 | length 2612.4
  Top Layer w6: v1@360,1735 v1(360,1730) 265,1825 265,2100 320,2155 320,2310 335,2325 560,2325 645,2240 825,2240 900,2315 1480,2315 v1(1485,2310) ; v1(1405,1960) 1405,1970 1443.27,2008.27 U1.12
  Bottom Layer w6: v1(360,1730) 455,1635 J3.6 ; v1(1405,1960) 1450,1960 1490,2000 1490,2068.75 1505,2083.75 1505,2191.25 1490,2206.25 1490,2275 1485,2280 v1(1485,2310)
UTX: J3.3 U3.2 | length 881.1
  Top Layer w6: v1(790,810) 795,805 U3.2
  Bottom Layer w6: J3.3 665,1495 665,1025 725,965 725,850 765,810 v1(790,810)
VBUS: POW-SW1.1 U2.1 | length 1023.7
  Top Layer w10: v1(481.18,120) U2.1
  Top Layer w20: v1(45,250) 30,235 30,75 75,30 440,30 455,45 455,93.82 v1(481.18,120)
  Bottom Layer w20: v1(45,250) 45,385 v1(95,435)
  other v1: 510,220 545,225 525,240 545,265 255,425 260,505 95,515
VCC3V3: C2.1 C3.1 C11.1 C15.1 D3.1 D5.1 J1.1 J5.1 J7.1 J9.8 J10.4 P1.1 P1.2 R3.2 R8.2 R9.2 R10.2 R11.2 R13.2 R16.2 U1.9 U1.24 U1.36 U1.48 U3.4 U3.16 U4.2 | length 15626.6
  Top Layer w10: v1(340,1270) 365,1295 v1(1160,1295) ; P1.2 510,2140 1035,2140 v1(1060,2115) ; v1(1109,1765) 1109,1780 1108.5,1780.5 1119.73,1791.73 U1.36 ; v1(1170,2075) 1191.18,2075 U1.24 U1.24@1206.73,2028.27 ; v1@1297.5,1957.5 1345,1910 1375,1910 1395,1890 1395,1805 1423.27,1776.73 U1.48 ; v1(1300,1960) 1325,1935 1420,1935 1434.21,1949.21 U1.9
  Top Layer w20: v1(55,1875) 55,1365 90,1330 v1(90,1265) ; v1@90,1075 45,1030 45,330 120,255 275,255 420,400 620,400 v1(715,305) ; C2.1 125,1340 220,1435 D3.1 ; P1.2 P1.1 ; v1(620,2340) 635,2355 1750,2355 J1.1 2315,2265 2515,2065 2515,1925 2460,1870 2130,1870 1915,1655 1915,1405 1830,1320 v1(1725,1320) 1710,1335 D5.1 ; R3.2 716.26,303.74 v1(715,305) ; U3.4 v1(785,705) 740,660 740,630 715,605 715,365 ; U3.16 v1(1155,855) 1200,810 1200,545 1250,495 ; J9.8 v1(2090,1100) ; J5.1@2280,505 2275,500 J7.1 R13.2 1572.4,500 R8.2 R9.2 R10.2 R11.2 1252.6,497.6 1250,495 ; J5.1@2285,505 R16.2 ; v1(715,305) 715,365 ; 715,365 790,440 1155,440 1210,495 1250,495
  Bottom Layer w10: v1(1060,2115) 1110,2115 1150,2075 v1(1170,2075) 1285,1960 v1(1300,1960) ; v1(1109,1765) 1060,1716 1060,1390 1155,1295 v1(1160,1295)
  Bottom Layer w20: v1(55,1875) 75,1895 515,1895 565,1945 565,2085 P1.2 ; P1.1@480,2275 480,2320 500,2340 v1(620,2340) ; C15.1 1135,835 v1(1155,855) ; J7.1 1945,665 J9.8 J9.8@1945,960 ; J1.1 2060,2265 2160,2165 2160,1925 2250,1835 2470,1835 2515,1790 2515,1315 2480,1280 2418.74,1280 J10.4@2344.37,1354.37 ; v1(2090,1100) J10.4@2344.37,1354.37 ; J10.4 J10.4@2344.37,1354.37
  other v1: 93.82,1073.01 355,1105 305,1110 85,1175 145,1180 85,1215 305,1220 345,1220 305,1270
VCC5V: C9.1 C10.2 D1.2 D2.2 J9.9 R4.1 U4.3 | length 3181
  Top Layer w20: v1(1025,385) v1(1805,385)
  Bottom Layer w20: v1(525,595) 525,535 265,275 265,95 320,40 520,40 650,170 945,170 980,205 980,350 v1@1015,385 ; v1(1805,385) 1980,385 2070,475 2070,795 2045,820 J9.9
  other v1: 480,700 465,750 515,750 600,750 650,750 380,800 280,820 280,870 275,915 215,920 215,970
pads on no net: J1.8 J5.3 J10.2 J10.3 J11.1 J11.2 J11.3 J11.4 J11.6 KEY1.2 KEY1.4 KEY2.2 KEY2.4 KEY3.2 KEY3.4 KEY4.2 KEY4.4 KEY_RST.2 KEY_RST.4 POW-SW1.4 POW-SW1.5 U2. U2.MH1 U2.MH2 U3.9 U3.10 U3.11 U3.12 U3.13 U3.14 U3.15

## Polygon pours and split planes (outlines as drawn)
GND on Top Layer "GND_L01_P038" (solid, remove dead copper, pour order 38): 205,2375 2420,2375 2420,2235 2455,2200 2470,2185 2620,2185 2620,215 2490,215 2460,185 2440,165 2440,45 2440,5 2435,0 150,0 30,0 25,5 0,30 0,35 0,2385 100,2385
VCC3V3 on Top Layer "VCC3V3_L01_P026" (solid, remove dead copper, pour order 26): 280,1290 350,1290 350,1240 360,1230 375,1215 375,1155 375,1080 280,1080 280,1290
GND on Top Layer "GND_L01_P004" (solid, remove dead copper, pour order 4): 370,285 415,285 415,70 370,70
VBUS on Top Layer "VBUS_L01_P006" (solid, remove dead copper, pour order 6): 470,280 560,280 560,200 555,195 525,195 490,195 490,170 490,145 470,145
VBUS on Top Layer "VBUS_L01_P008" (solid, remove dead copper, pour order 8): 70,540 290,540 290,405 285,400 70,400 70,540
NetD1_1 on Top Layer "NETD1_1_L01_P010" (solid, remove dead copper, pour order 10): 75,750 275,750 275,650 475,650 475,530 470,525 320,525 315,525 280,560 275,565 75,565 75,750
VCC5V on Top Layer "VCC5V_L01_P012" (solid, remove dead copper, pour order 12): 315,910 425,910 435,900 435,795 550,795 555,800 555,850 675,850 675,725 625,725 600,700 600,575 500,575 500,675 320,675 315,680 315,910
GND on Top Layer "GND_L01_P014" (solid, remove dead copper, pour order 14): 445,915 445,805 535,805 540,810 540,870 665,870 670,875 670,970 455,970 455,930 445,920 445,880
VCC5V on Top Layer "VCC5V_L01_P016" (solid, remove dead copper, pour order 16): 125,985 220,985 220,1000 240,1020 305,1020 305,915 310,910 320,900 428.23,900 428.23,801.77 435,795 250,795 250,885 235,900 125,900 125,985
VCC3V3 on Top Layer "VCC3V3_L01_P018" (solid, remove dead copper, pour order 18): 75,1290 160,1290 160,995 75,995 75,1290
GND on Top Layer "GND_L01_P020" (solid, remove dead copper, pour order 20): 175,1290 265,1290 265,1025 260,1020 170,1020 170,1285 175,1290
GND on Top Layer "GND_L01_P024" (solid, remove dead copper, pour order 24): 390,1250 390,1050 395,1045 425,1015 455,1015 455,940.79 458.35,937.44 521.65,937.44 521.65,1228.35 500,1250 390,1250
GND on Bottom Layer "GND_L02_P040" (solid, remove dead copper, pour order 40): 10,2375 20,2385 2420,2385 2420,2235 2470,2185 2625,2185 2625,220 2620,215 2615,220 2495,220 2440,165 2440,5 5,5 5,2370 60,2370 75,2385
NetD1_1 on Bottom Layer "NETD1_1_L02_P036" (solid, remove dead copper, pour order 36): 75,745 270,745 270,655 275,650 470,650 470,525 315,525 305,525 265,565 160,565 75,565 75,745
GND on Bottom Layer "GND_L02_P034" (solid, remove dead copper, pour order 34): 415,70 415,280 370,280 370,140 320,140 320,70 415,70
VBUS on Bottom Layer "VBUS_L02_P032" (solid, remove dead copper, pour order 32): 475,280 560,280 560,200 470,200 470,280 475,280
VBUS on Bottom Layer "VBUS_L02_P030" (solid, remove dead copper, pour order 30): 70,540 295,540 295,400 70,400 70,540
VCC5V on Bottom Layer "VCC5V_L02_P028" (solid, remove dead copper, pour order 28): 130,985 280,985 290,975 330,935 330,895 410,895 495,810 510,795 670,795 670,705 665,700 660,695 605,695 605,615 550,560 500,560 495,565 485,575 485,645 480,645 455,670 350,775 245,775 245,875 235,885 220,900 175,900 130,945 130,985
VCC3V3 on Bottom Layer "VCC3V3_L02_P022" (solid, remove dead copper, pour order 22): 285,1200 375,1200 375,1080 300,1080 220,1000 215,995 70,995 70,1290 285,1290 285,1200

## Keep-outs
Keep-Out Layer:
  lines w7.87: 0,39.99 ccw(c39.37,39.37) 39.37,0 ; 0,2335.63 cw(c39.37,2335.63) 39.99,2375 ; 2585.01,0 ccw(c2585.63,39.37) 2625,39.37 ; 2585.63,2375 cw(c2585.63,2335.63) 2625,2335.01

## Other copper
Top Layer:
  rectangle net GND: 485,880 630,965
  rectangle net GND: 405,1040 510,1140
  rectangle net VCC5V: 175,900 285,985
  rectangle net VCC5V: 565,725 645,805
  rectangle net VCC5V: 425,680 600,780
  rectangle net VCC5V: 320,785 430,855
  rectangle net VCC3V3: 280,1080 375,1290
  rectangle net VBUS: 495,200 560,280
  rectangle net GND: 375,70 415,180
  rectangle net GND: 370,152.05 395.41,221.1
  rectangle net GND: 385,221.1 395.41,280
  rectangle net GND: 320,70 400,140
  rectangle net VBUS: 470,202.25 499.06,280
  rectangle net NetD1_1: 85,645 250,750
  rectangle net NetD1_1: 85,565 275,645
  rectangle net NetD1_1: 330,540 425,650
  rectangle net VCC5V: 515,600 585,710
  rectangle net VCC5V: 315,675 430,790.32
  rectangle net VCC5V: 315,819.49 428.23,900
  rectangle net VCC5V: 565,790.32 650.51,840
  rectangle net GND: 445,845 530,920
  rectangle net GND: 569.49,870 665,928.43
  rectangle net VCC5V: 265,800 345,925
  rectangle net VCC5V: 125,901.29 190,975
  rectangle net VCC3V3: 90,1003.79 141.38,1280
  rectangle net GND: 390,1125 475,1240
Bottom Layer:
  rectangle net GND: 490,900 605,995
  rectangle net GND: 395,1010 515,1050
  rectangle net GND: 510,880 655,970
  rectangle net GND: 390,1040 500,1210
  rectangle net GND: 320,70 410,140
  rectangle net VBUS: 505,205 560,280
  rectangle net VCC3V3: 285,1133.75 355.93,1290

## Silkscreen, mask and mechanical layers (free items; w line width, h text height)
Top Overlay:
  lines w7.87: 945,2359.21 945,1060 2007.99,1060 2007.99,2359.21 ; 2295,1495 2295,1908.74 ; 2615,1290 2185,1290 2185,2117.44 2612.56,2117.44 2615,2115
  text "毕设2021" at 2220,1035 h60
Mechanical 13:
  lines w7.87: 0,39.37 0,2335.63 ; 39.37,0 2585.63,0 ; 39.37,2375 2585.63,2375 ; 2625,39.37 2625,2335.63